# Altium PCB SD171-6.0PCB4.PcbDoc (part 3 of 11)
Units mil, origin at the board's own origin, x right, y up, seen from the top; angles counter-clockwise.
Board outline 5995 x 3921.26 mil, 6 copper layers (Top Layer, GND, Mid-Layer 1, Mid-Layer 2, VCC, Bottom Layer); 477 components, 539 nets, 2143 pads, 1050 vias.
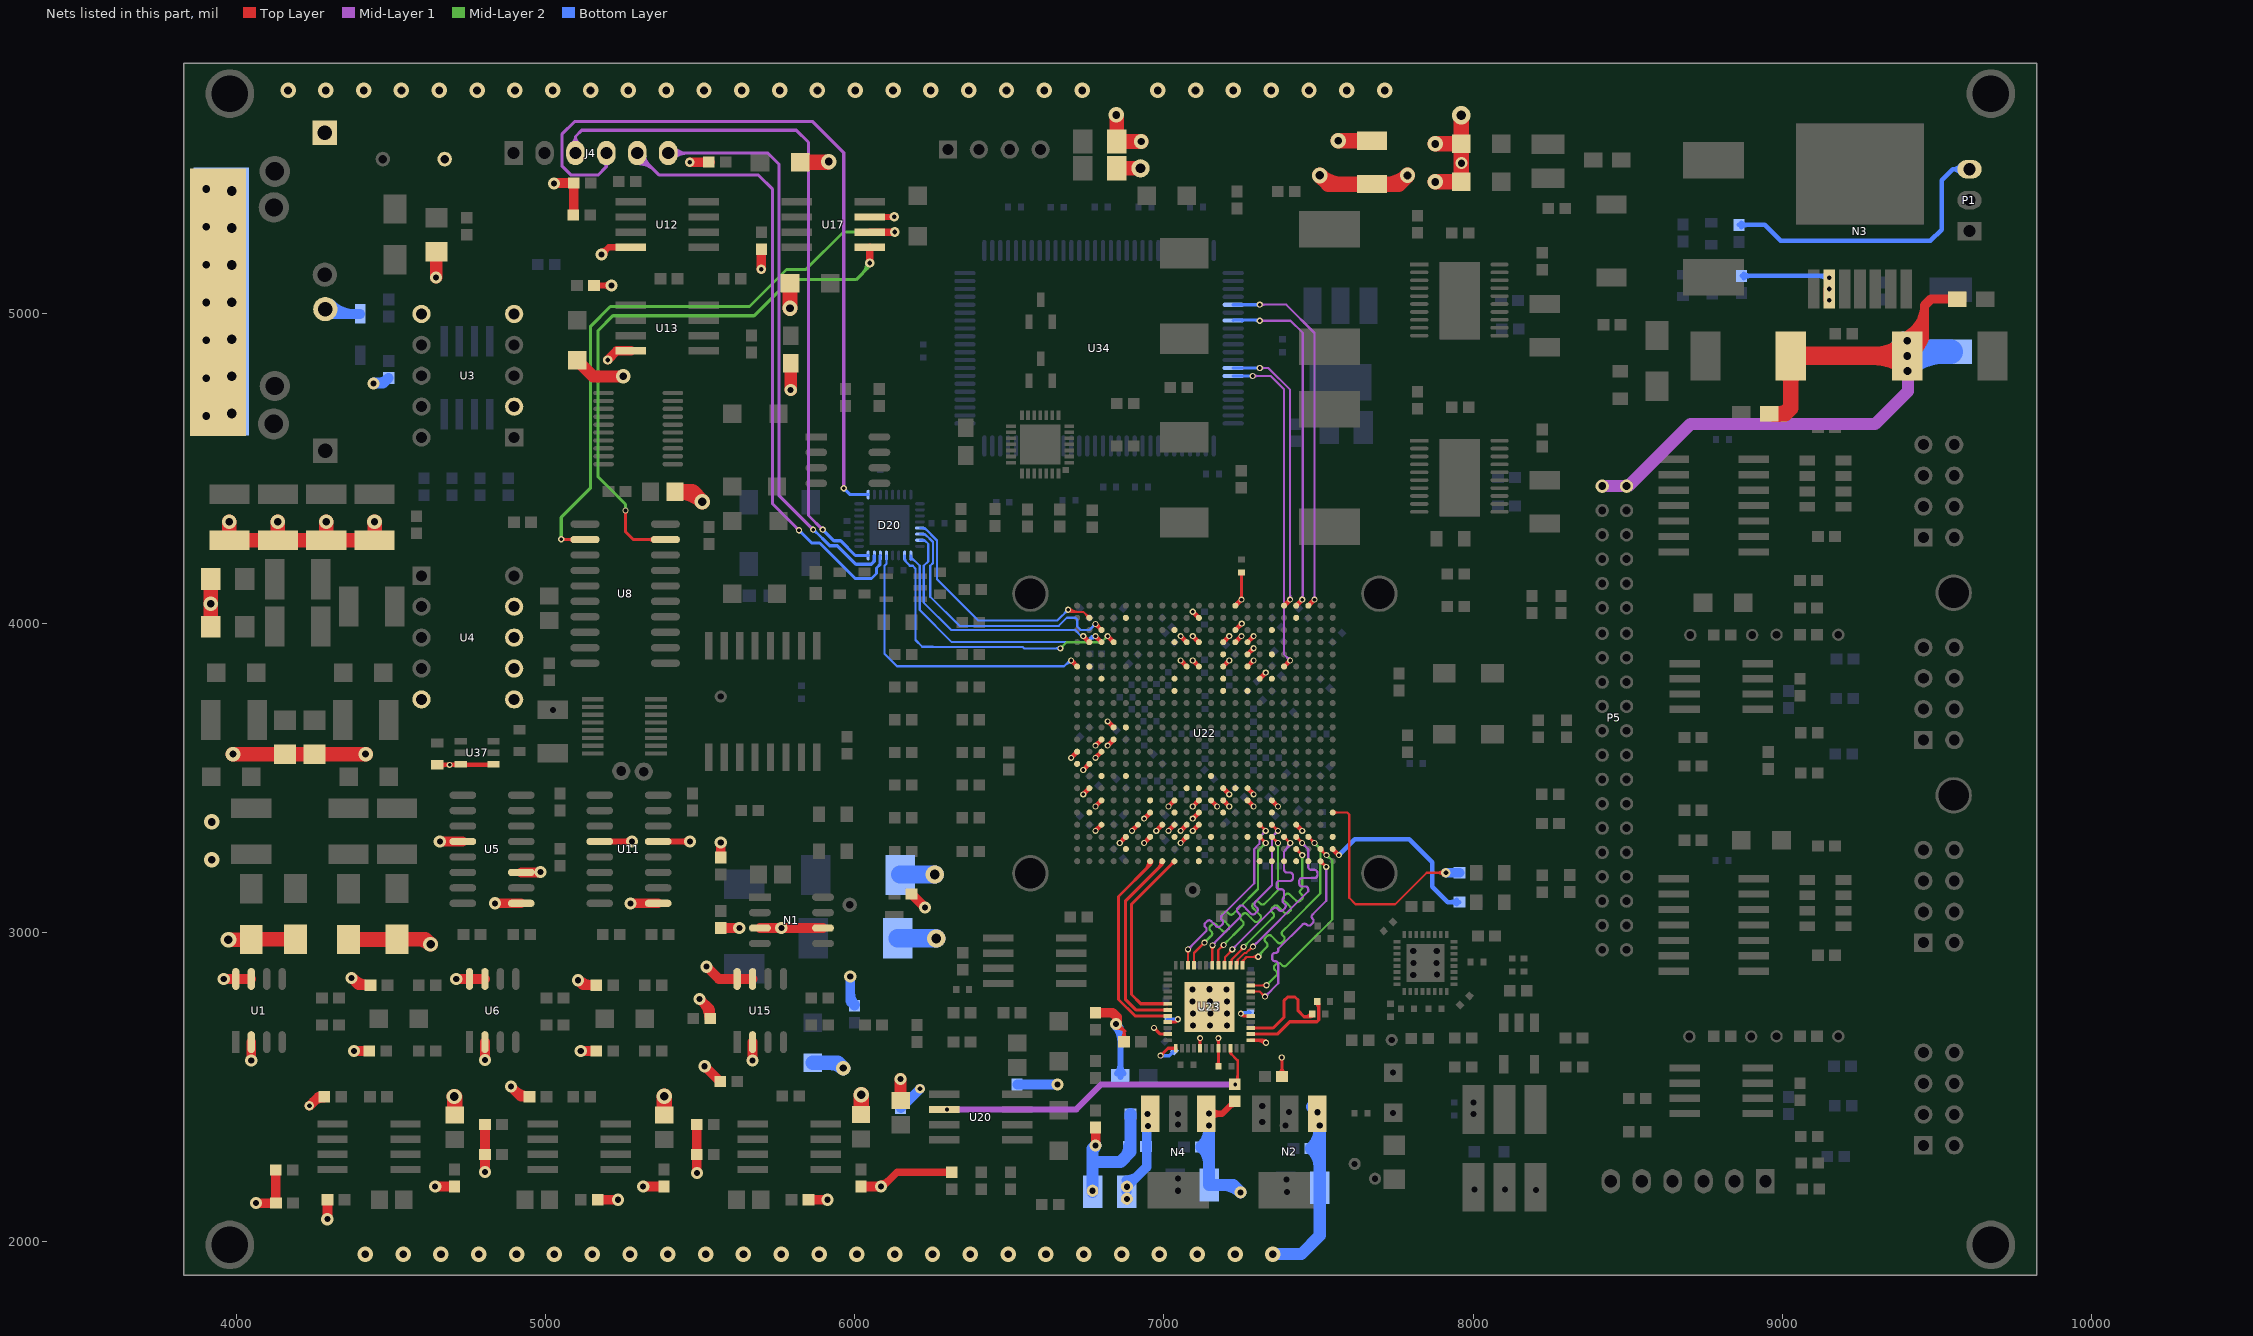
[diagram p7: the nets of this part, all layers, seen from the top]

## Via types
v1: diameter 19.68, hole 11.81, Top Layer to Bottom Layer, 521 vias
v2: diameter 50, hole 25, Top Layer to Bottom Layer, 162 vias
v3: diameter 30, hole 15, Top Layer to Bottom Layer, 100 vias
v4: diameter 39.37, hole 19.68, Top Layer to Bottom Layer, 74 vias
v5: diameter 31.5, hole 15.75, Top Layer to Bottom Layer, 44 vias
v6: diameter 40, hole 20, Top Layer to Bottom Layer, 38 vias
v7: diameter 24, hole 12, Top Layer to Bottom Layer, 33 vias
v8: diameter 47.24, hole 23.62, Top Layer to Bottom Layer, 24 vias
v9: diameter 59.06, hole 31.5, Top Layer to Bottom Layer, 10 vias
v10: diameter 60, hole 30, Top Layer to Bottom Layer, 9 vias
v11: diameter 25.98, hole 12.99, Top Layer to Bottom Layer, tented top, 9 vias
v12: diameter 23.62, hole 11.81, Top Layer to Bottom Layer, 8 vias
v13: diameter 20, hole 12, Top Layer to Bottom Layer, 6 vias
v14: diameter 50, hole 27.56, Top Layer to Bottom Layer, 4 vias
v15: diameter 51.18, hole 27.56, Top Layer to Bottom Layer, 2 vias
v16: diameter 39.37, hole 23.62, Top Layer to Bottom Layer, 2 vias
v17: diameter 80, hole 40, Top Layer to Bottom Layer, 1 vias
v18: diameter 47.24, hole 19.68, Top Layer to Bottom Layer, 1 vias
v19: diameter 47.24, hole 27.56, Top Layer to Bottom Layer, 1 vias
v20: diameter 22.05, hole 11.81, Top Layer to Bottom Layer, 1 vias

## Nets (pads, with @x,y where several pads share a name; then routed paths per layer and width w, separated by ;. In a path a pad name is that pad's centre, name@x,y a point inside that pad or via, vN(x,y) a via of type N, cw(c..) or ccw(c..) an arc to the next point about the centre after c; other vN are vias at no path point) (continued)
ADCLK_N: C62.1 U23.39 | length 360.8
  Top Layer w10: U23.39@7280.71,2689.4 7353.4,2689.4 7389,2725 7389,2779 7400,2790 7424,2790 7434,2780 7434,2746 7434,2745 7453,2726 ; C62.1@7473.56,2726 ccw(c7473.56,2738.8) C62.1@7483.63,2730.9 ; C62.1@7475.77,2737.07 cw(c7453,2754.94) 7453,2726 ; C62.1@7479.7,2734.98 7478.98,2734.98 7470,2726 7453,2726
ADCLK_P: C63.1 U23.38 | length 323.9
  Top Layer w10: U23.38@7280.71,2669.7 7366.7,2669.7 7407,2710 7495,2710 7501,2716 7500.7,2716.3 7500.7,2768.98 C63.1@7494.7,2774.98 ; C63.1@7492.16,2770.45 cw(c7471.56,2749.84) 7500.7,2749.84
ADCSB: U22.T22 U23.20 | length 733.2
  Top Layer w10: 6938.85,3200.85 ccw(c6910.48,3229.23) U22.T22@6950.61,3229.23 ; U22.T22@6952.02,3225.8 cw(c6943.76,3217.54) 6955.45,3217.54 cw(c6967.14,3217.54) U22.T22@6958.87,3225.8 ; U22.T22@6955.45,3229.23 6955.45,3217.45 6853,3115 6853,2782 6906.2,2728.8 U23.20@7012.11,2728.8 ; 6955.92,3217.92 ccw(c6944.62,3229.23) U22.T22@6960.61,3229.23
ADOUT: U8.9 U17.5 | length 1972.3
  Top Layer w10: v1@5254.58,4360.58 cw(c5246.31,4352.31) 5258,4352.31 cw(c5269.69,4352.31) v1@5261.42,4360.58 ; v1(5258,4364) 5258,4295 5283,4270 U8.9@5386.92,4270 ; U8.9@5346.67,4265.18 ccw(c5335.04,4253.56) 5335.04,4270 ccw(c5335.04,4286.44) U8.9@5346.67,4274.82
  Top Layer w23.62: v3@6047.62,5165.38 U17.5@6047.62,5215.48
  Mid-Layer 2 w10: v1@5254.58,4367.42 ccw(c5246.31,4375.69) 5258,4375.69 ccw(c5269.69,4375.69) v1@5261.42,4367.42 ; v1(5258,4364) 5258,4384 5169,4473 5169,4946 5217,4994 5674,4994 5791,5111 6004,5111 6048,5155 v3(6048,5165) cw(c6023.86,5165) 6040.93,5147.93 ; 6023.86,5130.86 ccw(c5989.72,5165) v3@6038,5165
ADSCLK: U22.R22 U23.19 | length 677.8
  Top Layer w10: 6979.9,3204.9 ccw(c6955.57,3229.23) U22.R22@6989.98,3229.23 ; U22.R22@6994.82,3229.23 6994.82,3219.82 6875,3100 6875,2782.63 6909.13,2748.5 U23.19@7012.11,2748.5 U23.19@7009.81,2750.8
ADSDIO: U22.P22 U23.18 | length 636.7
  Top Layer w10: U23.18@7012.11,2768.1 6924.9,2768.1 6895,2798 6895,3090.04 U22.P22@7034.19,3229.23 ; U22.P22@7029.35,3229.23 cw(c7017.66,3229.23) 7025.92,3220.96 cw(c7034.19,3212.69) U22.P22@7034.19,3224.39
ADV: U22.C1 U34.85 | length 1348.5
  Top Layer w15: U22.C1@7467.26,4056 v1(7486.95,4075.69)
  Mid-Layer 1 w7: v1(7310,5030) 7395.46,5030 7486.95,4938.52 v1(7486.95,4075.69) ; 7325.31,5030 cw(c7325.31,5045.31) 7314.48,5034.48 ccw(c7325.31,5045.31) 7325.31,5030 ; 7325.31,5030 ccw(c7325.31,5014.69) 7314.48,5025.52 cw(c7325.31,5014.69) 7325.31,5030 ; v1@7482.46,4080.17 ccw(c7471.63,4091) 7486.95,4091 ; v1@7482.46,4080.17 ccw(c7471.63,4091) 7486.95,4091 ; v1@7482.46,4080.17 ccw(c7471.63,4091) 7486.95,4091 ; 7486.95,4091 ccw(c7502.26,4091) v1@7491.43,4080.17 ; 7486.95,4091 ccw(c7502.26,4091) v1@7491.43,4080.17 ; 7486.95,4091 ccw(c7502.26,4091) v1@7491.43,4080.17
  Bottom Layer w10: U34.85@7224.06,5029.75 7309.75,5029.75 v1(7310,5030) ; 7297.7,5029.75 ccw(c7297.7,5042.3) 7306.58,5033.42 cw(c7297.7,5042.3) 7297.7,5029.75 ; 7298.92,5029.75 cw(c7298.92,5018.92) 7306.58,5026.58 ccw(c7298.92,5018.92) 7298.92,5029.75
AGND: C1.2 C2.2 C5.2 C6.2 C7.2 C8.2 C9.2 C10.2 C11.2 C13.1 C14.1 C15.2 C16.2 C19.1 C21.2 C25.2 C26.2 C27.2 C30.2 C31.2 C32.2 C33.2 C34.1 C36.2 C37.1 C39.2 C42.2 C44.2 C48.2 C50.2 C51.2 C53.1 C66.2 C67.2 C68.2 C76.2 C108.1 C109.2 C111.1 C112.1 C116.2 C137.1 C149.1 C150.1 C151.1 C157.1 C202.2 C203.2 C212.2 C213.2 C214.2 D1.2 D2.1 D3.2 D5.1 N1.3 N1.6 N2.1 N4.1 pad.0@3939,5038 pad.0@3950,5040 pad.0@6769,2163 pad.0@6924,5471 pad.0@7092,2814 pad.0@7093,2776 pad.0@7094,2698 pad.0@7094,2737 pad.0@7146.12,2374 pad.0@7146.12,2412.88 pad.0@7148,2815 pad.0@7149,2698 pad.0@7149,2776 pad.0@7150,2737 pad.0@7203,2814 pad.0@7204,2698 pad.0@7204,2737 pad.0@7204,2775 pad.0@7248,2158 pad.0@7497,2417 pad.0@7504.12,2374 pad.1@3984,4678 pad.1@3984,4798 pad.1@3984,4918 pad.1@3984,5038 pad.1@3984,5158 pad.1@3984,5278 pad.1@3984,5398 Q1.1 Q2.2 R3.1 R5.2 R7.1 R13.1 R16.1 R27.1 R31.1 R39.1 R40.1 R42.2 R64.2 R77.1 R78.2 R81.1 R116.2 U1.2 U1.7 U1.8 U3.2 U3.5 U3.6 U4.5 U4.6 U4.7 U4.8 U4.9 U5.1 U5.3 U5.12 U6.2 U6.7 U6.8 U11.1 U11.5 U11.12 U12.4 U13.4 U15.2 U15.7 U15.8 U17.7 U23.21 U23.23 U23.25 U23.29 U23.32 U23.37 U23.41 U23.49 Z1.1 | length 12063.4
  Top Layer w10: v4@6846.52,2688.39 cw(c6849.9,2655.9) 6873,2679 ; v4@6848,2704 6871,2681 C48.2@6871,2645 ; v4@6859.68,2703 ccw(c6885.48,2703) 6867.24,2684.76 ; C48.2@6861.81,2654.19 ccw(c6839.62,2676.38) 6871,2676.38 ccw(c6902.38,2676.38) C48.2@6880.19,2654.19 ; v1@6968,2685.16 cw(c6968,2673.47) 6976.27,2681.73 cw(c6984.53,2690) v1@6972.84,2690 ; v1(6968,2690) 6988.3,2669.7 U23.23@7012.11,2669.7 ; v1(6989,2600) 7013,2624 U23.25@7038.11,2624 ; v1@6989,2604.84 ccw(c6989,2616.53) 6997.27,2608.27 ccw(c7005.53,2600) v1@6993.84,2600 ; U23.21@7012.11,2709.1 7039.1,2709.1 7048,2718 v1(7045,2718) ; v1@7113.58,2653.58 cw(c7105.53,2645.53) 7116.91,2645.53 ; U23.29@7116.91,2624 7116.91,2656.91 v1(7117,2657) ; 7116.91,2645.09 cw(c7128.91,2645.09) v1@7120.42,2653.58 ; v1@7172.58,2653.58 cw(c7164.53,2645.53) 7175.91,2645.53 ; C149.1@7172.77,2570.52 ccw(c7165.18,2578.11) 7175.91,2578.11 ; 7175.91,2580 ccw(c7189.32,2580) C149.1@7179.84,2570.52 ; 7175.91,2645.09 cw(c7187.91,2645.09) v1@7179.42,2653.58 ; v1(7176,2657) 7175.91,2656.91 U23.32@7175.91,2624 7175.91,2573.37 C149.1@7177.3,2571.98 ; v1(7249,2736) 7256.2,2728.8 U23.41@7280.71,2728.8 ; U23.37@7280.71,2650 7319,2650 7329,2640 7329,2641 v1(7330,2642) ; 7298.99,2650 cw(c7298.99,2610.99) v1@7326.58,2638.58 ; 7323.13,2650 cw(c7323.13,2635.13) v1@7333.65,2645.65 ; R81.1@7372.91,2541.45 ccw(c7350.72,2563.64) 7382.1,2563.64 ccw(c7413.49,2563.64) R81.1@7391.29,2541.45 ; v1@7377.58,2590.58 cw(c7366.65,2579.65) 7382.1,2579.65 ; v1(7381,2594) 7382.1,2592.9 R81.1@7382.1,2532.26
  Top Layer w20: C19.1@5156,5092 v4(5213,5092) ; U11.12@5174.51,3293 v4(5279,3293) ; v4(5180,5192) 5203.48,5215.48 U12.4@5275.4,5215.48 ; v4@5180,5201.69 ccw(c5180,5225.07) 5196.53,5208.53 ccw(c5213.07,5192) v4@5189.69,5192 ; U11.5@5363.49,3293 v4(5466,3293) ; U17.7@6047.62,5313.91 6127.09,5313.91 v3(6127,5314) ; N4.1@7136.55,2412.29 7188.29,2412.29 C137.1@7229,2453 ; N4.1@7150.36,2398.48 cw(c7183.69,2365.15) 7183.69,2412.29 cw(c7183.69,2459.43) N4.1@7150.36,2426.1 ; N4.1@7152.97,2406.03 cw(c7168.07,2390.93) 7168.07,2412.29 ; N4.1@7152.97,2419.73 ccw(c7170.93,2437.69) 7170.93,2412.29 ; C137.1@7213.64,2437.64 cw(c7229,2422.27) C137.1@7229,2444 ; 5176.31,5092 ccw(c5176.31,5072.69) 5162.66,5086.34 cw(c5176.31,5072.69) 5176.31,5092 ; 5176.31,5092 cw(c5176.31,5111.31) 5162.66,5097.66 ccw(c5176.31,5111.31) 5176.31,5092 ; 5189.62,5092 cw(c5189.62,5068.62) 5206.15,5085.15 ccw(c5189.62,5068.62) 5189.62,5092 ; 5189.62,5092 ccw(c5189.62,5115.38) 5206.15,5098.85 cw(c5189.62,5115.38) 5189.62,5092 ; 5255.62,3293 cw(c5255.62,3269.62) 5272.15,3286.15 ccw(c5255.62,3269.62) 5255.62,3293 ; 5255.62,3293 ccw(c5255.62,3316.38) 5272.15,3299.85 cw(c5255.62,3316.38) 5255.62,3293 ; 5442.62,3293 cw(c5442.62,3269.62) 5459.15,3286.15 ccw(c5442.62,3269.62) 5442.62,3293 ; 5442.62,3293 ccw(c5442.62,3316.38) 5459.15,3299.85 cw(c5442.62,3316.38) 5442.62,3293
  Top Layer w23.62: v4(6084,2177) 6090,2177 6136,2223 R64.2@6313.33,2223 ; v4@6084,2184.87 ccw(c6084,2218.37) 6107.68,2194.68
  Top Layer w30: v3(5200,4851) 5229.48,4880.48 U13.4@5275.4,4880.48 ; v3(5466,5491) C34.1@5532,5491 ; v3(5697,5145) 5697.31,5145.31 C36.2@5697.31,5209.69
  Top Layer w31.5: v4(3958,2848) 3996.75,2848 U1.8@3997,2848.25 U1.7@4047,2848.25 ; v4(4047,2584) U1.2@4047,2644 ; v4(4062,2123) C5.2@4127,2123 4126,2124 R5.2@4126,2230 ; v5(4235,2438) 4264,2467 C8.2@4283,2467 ; v4(4293,2071) 4294,2072 C9.2@4294,2134 ; v4(4371,2851) 4394,2828 C10.2@4433,2828 ; v4(4379,2615) C11.2@4429,2615 ; v4(4642,2177) C15.2@4705,2177 ; v4(4657,3293) U5.12@4731.51,3293 ; v4(4710.25,2848.25) U6.8@4753,2848.25 U6.7@4803,2848.25 ; v4(4803,2224) C16.2@4803,2280 R27.1@4803,2377 ; v4(4803,2586) U6.2@4803,2644 ; v4(4836,3093) U5.1@4920.49,3093 ; v4(4887,2500) 4920,2467 C21.2@4947,2467 ; v4@4897.77,2489.23 ccw(c4946,2537.46) C21.2@4946,2469.25 ; v4@4900,2487 ccw(c4943.02,2530.01) C21.2@4945.89,2469.25 ; U5.3@4920.49,3193 4982,3193 v4(4983,3194) ; v4(5027,5422) 5029,5424 C212.2@5090,5424 5090,5321 R31.1@5089,5320 ; v4(5104,2844) 5120,2828 C26.2@5163,2828 ; v4(5113,2615) C27.2@5163,2615 ; C25.2@5168,2134 v4(5234,2134) ; v4(5274,3092) 5275,3093 U11.1@5363.49,3093 ; v4(5315,2177) C31.2@5382,2177 ; R40.1@5488.37,2377 5488.37,2220.63 v4(5489,2220) ; v4(5497,2784) 5532,2749 R39.1@5532,2720 R39.1@5533,2719 ; v4(5514,2566) C30.2@5564,2516 ; v4(5520,2888) 5559.75,2848.25 U15.8@5619,2848.25 U15.7@5669,2848.25 ; R42.2@5566,3013 v4(5626,3013) ; C32.2@5566,3241 v4(5566,3290) ; v4(5669,2584) U15.2@5669,2644 ; N1.3@5692.75,3013 v4(5762,3013) N1.6@5897,3013 ; C39.2@5850,2134 v4(5911,2134) ; v4@5985,2855 v4(5985,2856) ; C42.2@6020,2177 v4(6084,2177) ; C44.2@6183,3123 v4(6227,3079) ; v4(6779,2309) C53.1@6779,2368 ; C51.2@6779,2739 6834,2739 6848,2725 v4@6848,2704 ; C10.2@4433,2828 cw(c4433,2908.88) 4373.88,2853.69 ccw(c4433,2908.88) C10.2@4433,2828 ; 4247.43,2450.43 cw(c4282,2415.86) 4282,2464.75 ccw(c4282,2415.86) 4247.43,2450.43 ; v4@5106.78,2846.78 ccw(c5152.13,2892.13) 5152.13,2828 cw(c5152.13,2892.13) v4@5106.78,2846.78 ; v4@5505.94,2775.06 cw(c5450.88,2720) 5528.75,2720 ccw(c5450.88,2720) v4@5505.94,2775.06
  Top Layer w39.37: v4(4645,5118) 4645.67,5118.67 C14.1@4645.67,5200.79
  Top Layer w40: v6(5792,4754) C37.1@5792,4840
  Top Layer w47.24: C1.2@3915.76,4142 3915.76,4062.24 v8@3915.88,4062.12 ; C2.2@3915.88,3988 v8@3915.88,4062.12 ; v8(3916,4062) v8@3915.88,4062.12 ; v15(3973,2975) 4046,2975 D1.2@4047,2976 4047.98,2976.98 D2.1@4190,2976.98 ; v8(3976,4328) 3976.38,4327.62 R3.1@3976.38,4267.72 R7.1@4132.98,4267.72 ; v8(3988,3576) 3988.12,3575.88 C6.2@4156,3575.88 C7.2@4252,3575.88 v8(4416.88,3575.88) ; v8(4132.61,4328) 4132.98,4327.62 R7.1@4132.98,4267.72 ; v8(4289.21,4328) 4289.59,4327.62 R13.1@4289.59,4267.72 ; D3.2@4362,2976 4518.02,2976 D5.1@4519,2976.98 4610.02,2976.98 v19(4627,2960) ccw(c4586,2919) 4586,2976.98 ; v8(4445.82,4328) 4446.19,4327.62 R16.1@4446.19,4267.72 R13.1@4289.59,4267.72 ; v2(6846,5644) 6847.12,5642.88 R77.1@6847.12,5558 v8(6927,5558) ; R78.2@6847.12,5471 pad.0@6924,5471 ; R7.1@4132.98,4267.72 R13.1@4289.59,4267.72
  Top Layer w50: v15(7504,5448) 7532,5420 C68.2@7673,5420 7760,5420 v2(7788,5448) ; v2(7788,5448) cw(c7720.4,5515.6) 7720.4,5420 ccw(c7720.4,5515.6) v2(7788,5448) ; v15@7504.42,5448.42 ccw(c7573.02,5517.02) 7573.02,5420 cw(c7573.02,5517.02) v15@7504.42,5448.42
  Bottom Layer w10: v1(6989,2600) 7017.57,2600 C157.1@7033.39,2615.83 ; v1@6992.42,2596.58 cw(c7000.69,2588.31) 7000.69,2600 cw(c7000.69,2611.69) v1@6992.42,2603.42 ; C151.1@7012,2718 v1(7045,2718) ; C151.1@7016.54,2714.46 cw(c7025.07,2705.93) 7025.07,2718 cw(c7025.07,2730.07) C151.1@7016.54,2721.54 ; v1@7041.58,2714.58 ccw(c7033.31,2706.31) 7033.31,2718 ccw(c7033.31,2729.69) v1@7041.58,2721.42 ; v1(7249,2736) 7252.3,2739.3 C150.1@7280.02,2739.3 ; v1@7252.42,2732.58 cw(c7268.66,2716.34) 7268.66,2739.3 ; C150.1@7275.48,2735.77 ccw(c7266.95,2727.23) 7266.95,2739.3 ccw(c7266.95,2751.37) C150.1@7275.48,2742.84
  Bottom Layer w20: v4@6838.15,2696.15 cw(c6787.82,2645.82) 6859,2645.82 ; v4@6848,2704 6859,2693 C50.2@6859,2532 ; C50.2@6848.39,2542.61 ccw(c6822.79,2568.21) 6859,2568.21 ccw(c6895.21,2568.21) C50.2@6869.61,2542.61
  Bottom Layer w31.5: Q2.2@4286.66,5015.74 4302.47,4999.93 Z1.1@4400,4999.93 ; Q2.2@4303.36,5032.44 ccw(c4381.86,5110.94) 4381.86,4999.93 ; v4(4443,4775) 4474,4775 R116.2@4492,4793 ; v4(5985,2856) 5985,2776 C111.1@5999,2762 ; C112.1@6148,2430 v5(6211,2493) ; C116.2@6525,2507 v4(6656,2507) ; v4@4443.84,4778.85 ccw(c4454.95,4830.04) R116.2@4492,4793 ; v4@4443.84,4778.85 ccw(c4454.95,4830.04) R116.2@4492,4793 ; v4@4443.84,4778.85 ccw(c4454.95,4830.04) R116.2@4492,4793 ; v4@4445.52,4775 ccw(c4445.52,4838.48) 4490.41,4793.59 cw(c4445.52,4838.48) v4@4445.52,4775 ; 5985,2802.24 ccw(c6038.24,2802.24) 6000.59,2764.59 cw(c6038.24,2802.24) 5985,2802.24
  Bottom Layer w39.37: C67.2@6768.88,2160 6768.88,2298.88 v4(6779,2309) ccw(c6803.43,2284.57) 6768.88,2284.57 ; 6776,2256 6859,2256 6892,2289 C202.2@6892,2411 ; 6872.61,2269.61 ccw(c6836.23,2306) C203.2@6887.68,2306 ; C214.2@7122.19,2303.81 ccw(c7064.43,2361.57) pad.0@7146.12,2361.57 ; C214.2@7122.19,2306.19 cw(c7064.43,2248.43) 7146.12,2248.43 ; pad.0@7145,2414 pad.0@7146.12,2412.88 C213.2@7146.12,2182 7224,2182 pad.0@7248,2158 ccw(c7190.06,2100.06) 7190.06,2182 ; v2(7352.31,1958) 7444,1958 7504.12,2018.12 C66.2@7504.12,2173 7504.12,2409.88 pad.0@7497,2417 ; C76.2@7476.19,2298.81 ccw(c7408.77,2366.23) pad.0@7504.12,2366.23 ; C76.2@7476.19,2301.19 cw(c7408.77,2233.77) 7504.12,2233.77 ; 7479.06,2434.94 cw(c7418.57,2374.44) pad.0@7504.12,2374
  Bottom Layer w59.06: C109.2@6138,2980 6262,2980 v9(6263,2979) ; C108.1@6146.62,3186 v9(6258,3186)
  other v2: 4415.99,1958 4538.34,1958 4660.69,1958 4783.03,1958 4905.38,1958 5027.73,1958 5150.07,1958 5272.42,1958 5394.76,1958 5517.11,1958 5639.46,1958 5761.8,1958 5884.15,1958 6006.5,1958 6128.84,1958 6251.19,1958 6373.54,1958 6495.88,1958 6618.23,1958 6740.58,1958 6862.92,1958 6985.27,1958 7107.61,1958 7229.96,1958 3919,3234 3919,3356.35 3901,4669.92 3901,4792.27 3901,4914.61 3901,5036.96 3901,5159.31 3901,5281.65 3901,5404 4165.95,5723 4288.3,5723 4410.65,5723 4532.99,5723 4655.34,5723 4777.69,5723 4900.03,5723 5022.38,5723 5144.73,5723 5267.07,5723 5389.42,5723 5511.76,5723 5634.11,5723 5756.46,5723 5878.8,5723 6001.15,5723 6123.5,5723 6245.84,5723 6368.19,5723 6490.54,5723 6612.88,5723 6735.23,5723 6979.92,5723 7102.27,5723 7224.61,5723 7346.96,5723 7469.31,5723 7591.65,5723 7714,5723
  other v4: 6845,2703
ASCLK: U8.12 U17.6 | length 2094.1
  Top Layer w10: v1(5050,4271) 5051,4270 U8.12@5127.08,4270 ; v1@5053.42,4274.42 ccw(c5064.1,4285.1) 5064.1,4270 ; U8.12@5086.83,4265.18 ccw(c5075.2,4253.56) 5075.2,4270 ccw(c5075.2,4286.44) U8.12@5086.83,4274.82
  Top Layer w23.62: U17.6@6047.62,5264.69 v5@6128.69,5264.69
  Mid-Layer 2 w10: v1@5046.58,4274.42 ccw(c5038.31,4282.69) 5050,4282.69 ccw(c5061.69,4282.69) v1@5053.42,4274.42 ; v1(5050,4271) 5050,4342 5144,4436 5144,4959 5209,5024 5659,5024 5778.5,5143.5 5841.5,5143.5 5963,5265 v5(6129,5265) ; v5@6121.4,5257.4 ccw(c6103.05,5239.05) 6103.05,5265 ccw(c6103.05,5290.95) v5@6121.4,5272.6
AVCC5V: C67.1 C68.1 C202.1 C203.1 C221.1 L7.1 L11.1 L13.2 L14.1 L17.1 L18.2 L19.1 L21.1 L30.1 L31.1 L35.1 N4.3 pad.0@6880,2137 pad.0@6880,2176.12 pad.0@6947,2411 pad.0@6948.82,2372 U37.3 U37.4 | length 2251.4
  Top Layer w15: C221.1@4649,3541 v1(4689,3541) 4829.55,3541 U37.4@4831.15,3542.6 ; C221.1@4658.99,3535.7 cw(c4671.79,3522.89) 4671.79,3541 cw(c4671.79,3559.11) C221.1@4658.99,3546.3 ; 4704.1,3541 ccw(c4704.1,3554.49) U37.3@4713.64,3544.95 ; U37.3@4736.06,3544.95 ccw(c4745.6,3554.49) 4745.6,3541 ; 4810.4,3541 ccw(c4810.4,3554.49) U37.4@4819.94,3544.95
  Top Layer w39.37: L11.1@5101,4850 5153,4798 v8(5251,4798) ; L21.1@6148,2455.37 v4(6148,2525)
  Top Layer w50: v14(4704,2468) 4705,2467 L7.1@4705,2408.37 ; L14.1@5383,2408.37 v14(5383,2469) ; L13.2@5417.37,4425 5474,4425 v14(5506,4393) ; v2(5790,5018) L18.2@5790,5100 ; L17.1@5824,5491 v2@5912,5491 ; L19.1@6020,2409.37 v14(6020,2474) ; v2(7564,5560) C68.1@7673,5560 ; v2(7878,5427) L31.1@7962,5427 L30.1@7962,5550 ; v2(7878,5550) L30.1@7962,5550 ; v9(7962,5643) L30.1@7962,5550 ; L30.1@7962.88,5549.12 L30.1@7962,5550 ; L13.2@5428.75,4425 cw(c5428.75,4315.75) v14(5506,4393) ; L13.2@5428.75,4425 cw(c5428.75,4315.75) v14(5506,4393) ; L13.2@5428.75,4425 cw(c5428.75,4315.75) v14(5506,4393)
  Bottom Layer w31.5: C67.1@6879.12,2160 6879.12,2175.12 6944,2240 6944,2408 pad.0@6947,2411 ; C67.1@6879.12,2197.4 ccw(c6879.12,2251.2) 6917.16,2213.16 ; 6944,2350.86 cw(c6969.96,2350.86) pad.0@6951.6,2369.22 ; pad.0@6944,2393.14 ccw(c6969.96,2393.14) pad.0@6951.6,2374.78
  Bottom Layer w47.24: L35.1@5864,2577 5945,2577 v8(5962,2560) ; v8(5962,2560) ccw(c5920.96,2518.96) 5920.96,2577 cw(c5920.96,2518.96) v8(5962,2560)
  other v2: 5915,5493
  other v16: 7963,5488
B1_LED: R123.1 U22.A21 | length 649.3
  Top Layer w15: U22.A21@7546,3268.6 v1(7565.69,3248.91)
  Bottom Layer w15: v1(7565.69,3248.91) 7616.77,3300 7794,3300 7868,3226 7868,3147 7918,3097 R123.1@7956,3097 ; 7929.65,3097 ccw(c7929.65,3122.35) 7947.58,3104.42 cw(c7929.65,3122.35) 7929.65,3097 ; 7929.65,3097 cw(c7929.65,3071.65) 7947.58,3089.58 ccw(c7929.65,3071.65) 7929.65,3097
B1_NC1: U22.A20
B1_NC4: U22.E22
B1_NC13: U22.F22
B1_NC14: U22.C22 | length 1.5
  Top Layer w15: U22.C22@7467.26,3229.23 U22.C22@7467.26,3230.74
B1_NC16: U22.D19 | length 28.5
  Top Layer w15: U22.D19@7427.89,3347.34 v1(7447.58,3327.65)
  Mid-Layer 1 w7: v1@7447.58,3326.97 v1(7447.58,3327.65)
B1_NC17: U22.F21
B1_NC19: U22.J16
B1_NC21: U22.N20 | length 27.8
  Top Layer w15: v1(7053.87,3288.28) U22.N20@7073.56,3307.97
B1_NC24: U22.H17 | length 28.5
  Top Layer w15: U22.H17@7270.41,3426.08 v1(7290.1,3406.39)
  Mid-Layer 1 w7: v1@7290.1,3405.71 v1(7290.1,3406.39)
B1_NC25: U22.F18
B1_NC26: U22.H16 | length 27.8
  Top Layer w15: U22.H16@7270.41,3465.45 v1(7290.1,3445.76)
B1_NC27: U22.K16 | length 27.8
  Top Layer w15: U22.K16@7191.67,3465.45 v1(7211.36,3445.76)
B1_NC28: U22.G22
B1_NC29: U22.K17 | length 27.8
  Top Layer w15: U22.K17@7191.67,3426.08 v1(7211.36,3406.39)
B1_NC30: U22.L20 | length 0.3
  Top Layer w15: U22.L20@7152.3,3307.7 U22.L20@7152.3,3307.97
B1_NC31: U22.M22
B1_NC32: U22.H20
B1_NC33: U22.F17 | length 27.8
  Top Layer w15: U22.F17@7349.15,3426.08 v1(7368.84,3406.39)
B1_NC34: U22.M21
B1_NC38: U22.D22
B1_NC39: U22.V21
B1_NC41: U22.M19 | length 27.8
  Top Layer w15: v1(7093.24,3327.65) U22.M19@7112.93,3347.34
B1_NC42: U22.N19 | length 27.8
  Top Layer w15: v1(7053.87,3327.65) U22.N19@7073.56,3347.34
B1_NC43: U22.M16
B1_NC44: U22.L15
B1_NC45: U22.P19 | length 27.8
  Top Layer w15: v1(7014.5,3327.65) U22.P19@7034.19,3347.34
B1_NC46: U22.P20
B1_NC49: U22.L17 | length 27.8
  Top Layer w15: U22.L17@7152.3,3426.08 v1(7171.99,3406.39)
B1_NC50: U22.K18
B1_NC51: U22.U19 | length 27.8
  Top Layer w15: v1(6896.39,3327.65) U22.U19@6916.08,3347.34
B1_NC52: U22.V20 | length 27.8
  Top Layer w15: v1(6857.02,3288.28) U22.V20@6876.71,3307.97
B1_NC53: U22.M17 | length 27.8
  Top Layer w15: v1(7093.24,3406.39) U22.M17@7112.93,3426.08
B1_NC54: U22.M18 | length 27.8
  Top Layer w15: v1(7093.24,3367.02) U22.M18@7112.93,3386.71
B1_NC55: U22.P17 | length 27.8
  Top Layer w15: v1(7014.5,3406.39) U22.P17@7034.19,3426.08
B1_NC56: U22.N16
B1_NC57: U22.P18
B1_NC58: U22.R19 | length 27.8
  Top Layer w15: v1(6975.13,3327.65) U22.R19@6994.82,3347.34
B1_NC59: U22.T20 | length 27.8
  Top Layer w15: v1(6935.76,3288.28) U22.T20@6955.45,3307.97
B4NC1: U22.J3 | length 29.6
  Top Layer w15: U22.J3@7231.04,3977.26 v1(7251.78,3998) v1@7252,3998
B4NC2: U22.M2 | length 27.8
  Top Layer w15: v1(7093.24,4036.32) U22.M2@7112.93,4016.63
B4NC3: U22.K5
B4NC4: U22.H6 | length 27.8
  Top Layer w15: U22.H6@7270.41,3859.15 v1(7290.1,3878.84)
B4NC5: U22.F3
B4NC7: U22.M4 | length 27.8
  Top Layer w15: v1(7093.24,3957.58) U22.M4@7112.93,3937.89
B4NC8: U22.J4 | length 27.8
  Top Layer w15: U22.J4@7231.04,3937.89 v1(7250.73,3957.58)
B4NC9: U22.K4 | length 27.8
  Top Layer w15: U22.K4@7191.67,3937.89 v1(7211.36,3957.58)
B4NC10: U22.N4 | length 27.8
  Top Layer w15: v1(7053.87,3957.58) U22.N4@7073.56,3937.89
B4NC11: U22.N6 | length 27.8
  Top Layer w15: v1(7053.87,3878.84) U22.N6@7073.56,3859.15
B4NC12: U22.P3
B4NC13: U22.F5
B4NC14: U22.K7
B4NC15: U22.K8
B4NC16: U22.V2
B4NC18: U22.P8
B4NC19: U22.H8
B4NC20: U22.K6 | length 27.8
  Top Layer w15: U22.K6@7191.67,3859.15 v1(7211.36,3878.84)
B4NC21: U22.P4
B4NC22: U22.G7 | length 27.8
  Top Layer w15: U22.G7@7309.78,3819.78 v1(7329.47,3839.47)
B4NC23: U22.F7
B4NC24: U22.H5 | length 27.8
  Top Layer w15: U22.H5@7270.41,3898.52 v1(7290.1,3918.21)
B4NC25: U22.P7
B4NC26: U22.H4 | length 27.8
  Top Layer w15: U22.H4@7270.41,3937.89 v1(7290.1,3957.58)
B4NC27: U22.M6 | length 27.8
  Top Layer w15: v1(7093.24,3878.84) U22.M6@7112.93,3859.15
B4NC29: U22.D2
BA#: U22.E1 U34.93 | length 1119.4
  Top Layer w15: U22.E1@7388.52,4056 v1(7408.21,4075.69)
  Mid-Layer 1 w7: v1(7310,4825) 7337.62,4825 7408.21,4754.41 v1(7408.21,4075.69) ; v1@7314.48,4820.52 cw(c7325.31,4809.69) 7325.31,4825 ; v1@7314.48,4820.52 cw(c7325.31,4809.69) 7325.31,4825 ; v1@7314.48,4820.52 cw(c7325.31,4809.69) 7325.31,4825 ; v1@7314.48,4829.48 ccw(c7325.31,4840.31) 7325.31,4825 ; v1@7314.48,4829.48 ccw(c7325.31,4840.31) 7325.31,4825 ; v1@7314.48,4829.48 ccw(c7325.31,4840.31) 7325.31,4825 ; v1@7403.72,4080.17 ccw(c7392.89,4091) 7408.21,4091 ; v1@7403.72,4080.17 ccw(c7392.89,4091) 7408.21,4091 ; v1@7403.72,4080.17 ccw(c7392.89,4091) 7408.21,4091 ; 7408.21,4091 ccw(c7423.52,4091) v1@7412.69,4080.17 ; 7408.21,4091 ccw(c7423.52,4091) v1@7412.69,4080.17 ; 7408.21,4091 ccw(c7423.52,4091) v1@7412.69,4080.17
  Bottom Layer w10: U34.93@7224.06,4825.02 v1(7310,4825) ; 7298.25,4825.02 cw(c7298.25,4813.25) v1@7306.58,4821.58 ; 7298.25,4825.02 cw(c7298.25,4813.25) v1@7306.58,4821.58 ; 7298.25,4825.02 cw(c7298.25,4813.25) v1@7306.58,4821.58 ; 7298.37,4825.02 ccw(c7298.37,4836.63) v1@7306.58,4828.42 ; 7298.37,4825.02 ccw(c7298.37,4836.63) v1@7306.58,4828.42 ; 7298.37,4825.02 ccw(c7298.37,4836.63) v1@7306.58,4828.42
BANK0_LED: R122.1 U22.A18 | length 829.5
  Top Layer w7: U22.A18@7546,3386.71 7593.29,3386.71 7599.39,3380.61 7599.39,3110.61 7620,3090 7748,3090 7850,3192 v5(7912,3192) ; v5@7903.34,3183.34 ccw(c7882.43,3162.43) 7882.43,3192 ccw(c7882.43,3221.57) v5@7903.34,3200.66 ; 7561.31,3386.71 ccw(c7561.31,3371.4) 7550.48,3382.22 cw(c7561.31,3371.4) 7561.31,3386.71 ; 7561.31,3386.71 cw(c7561.31,3402.02) 7550.48,3391.19 ccw(c7561.31,3402.02) 7561.31,3386.71
  Top Layer w10: U22.A18@7546,3386.71 U22.A18@7547.16,3385.55
  Bottom Layer w31.5: v5(7912,3192) R122.1@7956,3192
BANK2_NC3: U22.T18 | length 27.8
  Top Layer w15: v1(6935.76,3367.02) U22.T18@6955.45,3386.71
BANK2_NC4: U22.Y19 | length 27.8
  Top Layer w15: v1(6778.28,3327.65) U22.Y19@6797.97,3347.34
BANK2_NC6: U22.V15
BANK2_NC7: U22.AA18
BANK2_NC10: U22.AA14 | length 27.8
  Top Layer w15: v1(6738.91,3524.5) U22.AA14@6758.6,3544.19
BANK2_NC13: U22.W12 | length 27.8
  Top Layer w15: v1(6817.65,3603.24) U22.W12@6837.34,3622.93
BANK2_NC16: U22.V11
BANK2_NC20: U22.W11 | length 27.8
  Top Layer w15: v1(6817.65,3681.99) U22.W11@6837.34,3662.3
BANK2_NC25: U22.Y7
BANK2_NC27: U22.AA6
BANK2_NC28: D20.13 U22.AB6 | length 995.8
  Top Layer w15: v1(6699.54,3878.84) U22.AB6@6719.23,3859.15
  Bottom Layer w7: D20.13@6102.16,4218.57 6102.16,4191.88 6096.2,4185.92 6096.2,3899.8 6136,3860 6677,3860 6695.84,3878.84 v1(6699.54,3878.84) ; 6682.39,3865.39 cw(c6699.54,3848.23) v1@6699.54,3872.49
BANK2_NC29: D20.7 U22.AA4 | length 826.9
  Top Layer w15: v1(6738.91,3957.58) U22.AA4@6758.6,3937.89
  Bottom Layer w7: D20.7@6210.43,4267.79 6225.49,4267.79 6237.14,4256.14 6237.14,4199.14 6223,4185 6223,4066 6311.4,3977.6 6533,3977.6 6712.52,3977.6 6732.54,3957.58 v1(6738.91,3957.58) ; D20.7@6221.25,4266.37 cw(c6221.25,4252.71) 6230.91,4262.37
BANK2_NC30: U22.Y13 | length 27.8
  Top Layer w15: v1(6778.28,3563.87) U22.Y13@6797.97,3583.56
BANK2_NC31: D20.6 U22.Y3 | length 921.1
  Top Layer w15: v1(6778.28,3996.95) U22.Y3@6797.97,3977.26
  Bottom Layer w7: D20.6@6210.43,4287.47 6227.14,4287.47 6252.81,4261.81 6252.81,4194.06 6244,4185.25 6244,4085 6338.4,3990.6 6659.6,3990.6 6686,4017 6714,4017 6719.57,4011.43 6719.57,3988.93 6730.9,3977.6 6758.94,3977.6 v1(6778.28,3996.95) ; D20.6@6221.25,4286.05 cw(c6221.25,4268.4) 6233.73,4280.88 ; v1@6771.94,3996.95 cw(c6756.63,3996.95) 6767.45,3986.12 cw(c6778.28,3975.29) v1@6778.28,3990.6
BANK2_NC32: U22.Y12 | length 27.8
  Top Layer w15: v1(6778.28,3603.24) U22.Y12@6797.97,3622.93
BANK2_NC33: D20.10 U22.W4 | length 1056.9
  Top Layer w15: v1(6817.65,3957.58) U22.W4@6837.34,3937.89
  Mid-Layer 2 w7: v1(6665,3918) 6684.55,3937.55 6797.62,3937.55 v1(6817.65,3957.58) ; v1@6665,3924.34 ccw(c6665,3939.65) 6675.83,3928.83 ccw(c6686.65,3918) v1@6671.34,3918 ; v1@6811.31,3957.58 cw(c6796,3957.58) 6806.82,3946.75 cw(c6817.65,3935.92) v1@6817.65,3951.23
  Bottom Layer w7: D20.10@6161.21,4218.57 6161.21,4201.9 6177.2,4185.92 6177.2,4185 6187,4185 6196,4176 6196,3945 6218,3923 6253,3923 6253.5,3922.5 6469.85,3922.5 6470.03,3922.68 6542.32,3922.68 6547,3918 6664,3918 v1(6665,3918) ; D20.10@6162.63,4207.75 ccw(c6180.17,4207.75) 6167.77,4195.35 ; v1@6660.52,3913.52 ccw(c6649.69,3902.69) 6649.69,3918 ccw(c6649.69,3933.31) v1@6660.52,3922.48
BANK2_NC34: D20.9 U22.Y4 | length 908.3
  Top Layer w15: v1(6778.28,3957.58) U22.Y4@6797.97,3937.89
  Bottom Layer w7: D20.9@6180.9,4206.33 cw(c6180.9,4187.55) 6194.17,4200.83 ; D20.9@6180.9,4213.33 cw(c6180.9,4211.45) D20.9@6182.22,4212.78 ; D20.9@6180.9,4218.57 6180.9,4214.1 6210,4185 6210,4042 6313.77,3938.23 6746.92,3938.23 6766.27,3957.58 v1(6778.28,3957.58) ; 6746.94,3938.25 cw(c6778.28,3906.91) v1@6778.28,3951.23 ; 6758.89,3950.2 cw(c6778.28,3930.81) v1@6778.28,3958.23
BANK2_NC35: D20.5 U22.AA2 | length 879.1
  Top Layer w7: v1@6689.54,4042.54 ccw(c6705.31,4058.31) 6705.31,4036 ; v1(6690,4043) 6691,4043 6698,4036 6739.23,4036 U22.AA2@6758.6,4016.63 ; v1@6694.48,4047.48 ccw(c6722.21,4075.21) 6722.21,4036 ; U22.AA2@6752.26,4016.63 ccw(c6736.94,4016.63) 6747.77,4027.46 ccw(c6758.6,4038.28) U22.AA2@6758.6,4022.97
  Bottom Layer w7: D20.5@6210.43,4307.16 6225.84,4307.16 6265.81,4267.19 6265.81,4141.19 6399,4008 6655,4008 v1(6690,4043) ; D20.5@6221.25,4305.74 cw(c6221.25,4291.22) 6231.51,4301.49 ; v1@6683.66,4043 cw(c6668.35,4043) 6679.17,4032.17 cw(c6690,4021.35) v1@6690,4036.66
BANK2_NC37: U22.T17
BANK2_NC38: U22.Y17 | length 27.8
  Top Layer w15: v1(6778.28,3406.39) U22.Y17@6797.97,3426.08
BANK2_NC39: U22.AB14
BANK2_NC40: U22.AA16 | length 27.8
  Top Layer w15: v1(6738.91,3445.76) U22.AA16@6758.6,3465.45
BANK2_NC41: U22.Y15
BANK2_NC42: U22.AB13 | length 27.8
  Top Layer w15: v1(6699.54,3563.87) U22.AB13@6719.23,3583.56
BATT12V: C88.1 C91.1 C104.1 C105.1 N3.2 P5.39 P5.40 R139.2 RT1.2 | length 3668.3
  Top Layer w30: C104.1@9392.38,4925.25 ccw(c9351.25,5026.99) 9461,5026.99 ; C104.1@9403.63,4897.43 ccw(c9369.24,4982.51) 9461,4982.51 ; v2(9405.2,4864) 9461,4919.8 ; C104.1@9414.87,4869.62 ccw(c9387.22,4938.02) 9461,4938.02 ; C104.1@9428.11,4918.94 ccw(c9444.11,4936.69) 9461,4919.79 ; C105.1@9567,5048 9482,5048 9461,5027 ; 9461,4919.8 9461,5027
  Top Layer w36: v3(9152,5044.56) v3(9152,5080.78)
  Top Layer w50: C91.1@8958,4677 9010,4677 9027.8,4694.8 ; C88.1@9010.67,4817.35 cw(c8969.34,4776.02) 9027.8,4776.02 cw(c9086.25,4776.02) C88.1@9044.92,4817.35 ; C88.1@9027.8,4864 9027.8,4694.8 ; 9027.79,4694.79 cw(c8979.76,4742.82) 8963,4677 ccw(c8979.76,4742.82) 9027.79,4694.79
  Top Layer w60: C88.1@9027.8,4864 v2(9405.2,4864) ; 9298.77,4864 ccw(c9298.77,5019.23) C104.1@9408.54,4909.46 ; 9299.77,4864 cw(c9299.77,4708.77) C104.1@9409.54,4818.54
  Mid-Layer 1 w39.37: P5.39@8417.26,4443.22 8496,4443.22 8503.22,4443.22 8704,4644 9301,4644 9407,4750 v2@9407,4815
  Bottom Layer w15: R139.2@8869,5123 9146,5123 v3(9152,5117) ; R139.2@8876.42,5115.58 cw(c8894.35,5097.65) 8894.35,5123 cw(c8894.35,5148.35) R139.2@8876.42,5130.42 ; 9119.41,5123 cw(c9119.41,5084.41) v3@9146.7,5111.7
  Bottom Layer w80: v2@9394.39,4902.39 ccw(c9453.28,4961.28) 9453.28,4878 ; v2@9395.39,4825.61 cw(c9521.88,4699.12) RT1.2@9521.88,4878 ; v2@9420,4878 RT1.2@9545,4878
  other v2: 9406,4815 9405,4913
BATTI: P1.3 R140.2 | length 1057.8
  Bottom Layer w15: R140.2@8860,5288 8944,5288 8995,5237 9480,5237 9516,5273 9516,5432 9552.24,5468.24 ; R140.2@8867.42,5280.58 cw(c8885.35,5262.65) 8885.35,5288 cw(c8885.35,5313.35) R140.2@8867.42,5295.42 ; P1.3@9578.81,5454.85 ccw(c9552.24,5435.18) 9552.24,5468.24 ; P1.3@9578.81,5481.62 cw(c9552.24,5501.29) 9552.24,5468.24 ; P1.3@9606.26,5468.24 9552.24,5468.24
BB#: U22.E6 U34.94 | length 1295
  Top Layer w15: U22.E6@7388.52,3859.15 v1(7408.21,3878.84)
  Mid-Layer 1 w7: v1(7287,4799) 7345.23,4799 7388.18,4756.05 7388.18,3910.02 7388,3909.84 7388,3899.04 v1(7408.21,3878.84) ; v1@7291.48,4794.52 cw(c7302.31,4783.69) 7302.31,4799 ; v1@7291.48,4794.52 cw(c7302.31,4783.69) 7302.31,4799 ; v1@7291.48,4794.52 cw(c7302.31,4783.69) 7302.31,4799 ; v1@7291.48,4803.48 ccw(c7302.31,4814.31) 7302.31,4799 ; v1@7291.48,4803.48 ccw(c7302.31,4814.31) 7302.31,4799 ; v1@7291.48,4803.48 ccw(c7302.31,4814.31) 7302.31,4799 ; 7397.38,3889.66 cw(c7386.55,3878.84) v1@7401.86,3878.84 ; 7397.38,3889.66 ccw(c7408.21,3900.49) v1@7408.21,3885.18 ; 7397.38,3889.66 cw(c7386.55,3878.84) v1@7401.86,3878.84 ; 7397.38,3889.66 ccw(c7408.21,3900.49) v1@7408.21,3885.18 ; 7397.38,3889.66 ccw(c7408.21,3900.49) v1@7408.21,3885.18 ; 7397.38,3889.66 cw(c7386.55,3878.84) v1@7401.86,3878.84
  Bottom Layer w10: U34.94@7224.06,4799.43 7286.57,4799.43 v1(7287,4799) ; 7274.26,4799.43 cw(c7274.26,4786.26) v1@7283.58,4795.58 ; 7274.26,4799.43 cw(c7274.26,4786.26) v1@7283.58,4795.58 ; 7274.26,4799.43 cw(c7274.26,4786.26) v1@7283.58,4795.58 ; 7276.35,4799.43 ccw(c7276.35,4809.65) v1@7283.58,4802.42 ; 7276.35,4799.43 ccw(c7276.35,4809.65) v1@7283.58,4802.42 ; 7276.35,4799.43 ccw(c7276.35,4809.65) v1@7283.58,4802.42
CK: C64.1 U22.J1 | length 209
  Top Layer w10: v1(7250.73,4075.69) 7250.73,4163.41 C64.1@7251.02,4163.7 ; v1@7247.3,4079.11 ccw(c7239.04,4087.38) 7250.73,4087.38 ; v1@7247.3,4079.11 ccw(c7239.04,4087.38) 7250.73,4087.38 ; v1@7247.3,4079.11 ccw(c7239.04,4087.38) 7250.73,4087.38 ; 7250.73,4087.38 ccw(c7262.42,4087.38) v1@7254.15,4079.11 ; 7250.73,4087.38 ccw(c7262.42,4087.38) v1@7254.15,4079.11 ; 7250.73,4087.38 ccw(c7262.42,4087.38) v1@7254.15,4079.11 ; C64.1@7247.48,4160.16 cw(c7239.65,4152.33) 7250.73,4152.33 ccw(c7239.65,4152.33) C64.1@7247.48,4160.16 ; 7250.73,4150.93 cw(c7263.79,4150.93) 7254.55,4160.16 ccw(c7263.79,4150.93) 7250.73,4150.93
  Top Layer w15: U22.J1@7231.04,4056 v1(7250.73,4075.69)
CKE#: U22.D1 U34.87 | length 1298.2
  Top Layer w15: U22.D1@7427.89,4056 v1(7447.58,4075.69)
  Mid-Layer 1 w7: v1(7310,4978) 7409.62,4978 7449,4938.62 7449,4077.11 v1(7447.58,4075.69) ; 7325.31,4978 cw(c7325.31,4993.31) 7314.48,4982.48 ccw(c7325.31,4993.31) 7325.31,4978 ; 7325.31,4978 ccw(c7325.31,4962.69) 7314.48,4973.52 cw(c7325.31,4962.69) 7325.31,4978 ; v1@7443.09,4080.17 ccw(c7428.83,4094.44) 7449,4094.44 ; v1@7443.09,4080.17 ccw(c7428.83,4094.44) 7449,4094.44 ; v1@7443.09,4080.17 ccw(c7428.83,4094.44) 7449,4094.44 ; 7449,4087.56 ccw(c7459.45,4087.56) v1@7452.06,4080.17 ; 7449,4087.56 ccw(c7459.45,4087.56) v1@7452.06,4080.17 ; 7449,4087.56 ccw(c7459.45,4087.56) v1@7452.06,4080.17
  Bottom Layer w10: U34.87@7224.06,4978.57 7225.49,4980 7308,4980 v1(7310,4978) ; U34.87@7252.95,4977.23 cw(c7259.64,4970.55) 7259.64,4980 ccw(c7259.64,4970.55) U34.87@7252.95,4977.23 ; 7293.48,4980 cw(c7293.48,4961.48) 7306.58,4974.58 ccw(c7293.48,4961.48) 7293.48,4980
CML: C137.2 U20.2 U23.34 | length 1205.5
  Top Layer w8: U20.2@6289,2426.21 6297.79,2426.21 v1(6298,2426) ; U23.34@7217.38,2615.14 ccw(c7226.12,2610.86) 7219.24,2603.98 ; 7223.36,2599.85 7215.11,2608.11 7215.11,2623.8 U23.34@7215.31,2624 7215.31,2607.9 7238.3,2584.91 7238.3,2517.3 C137.2@7229,2508 C137.2@7239.3,2518.3 ; C137.2@7226.87,2511.13 ccw(c7199.27,2538.73) 7238.3,2538.73 ; C137.2@7232.53,2505.47 ccw(c7218.58,2519.42) C137.2@7238.3,2519.42
  Mid-Layer 1 w20: v1(6298,2426) 6716,2426 6797,2507 v1(7231,2507)
CPLD_TCK: D20.16 J4.3 | length 2377
  Mid-Layer 1 w10: J4.3@5083.07,5551.3 ccw(c5069.57,5573.9) 5095.9,5573.9 ; J4.3@5095.9,5520.46 5095.9,5573.9 ; J4.3@5108.72,5551.3 cw(c5122.22,5573.9) 5095.9,5573.9 ; v1@5891.16,4302 ccw(c5879.47,4302) 5887.73,4310.27 ccw(c5896,4318.53) v1@5896,4306.84 ; v1(5896,4302) 5850,4348 5850,5555 5810.72,5594.28 5116.28,5594.28 5095.9,5573.9
  Bottom Layer w10: v1@5896,4297.16 cw(c5896,4285.47) 5904.27,4293.73 cw(c5912.53,4302) v1@5900.84,4302 ; v1(5896,4302) 5932,4266 5954,4266 6001.43,4218.57 D20.16@6043.1,4218.57
CPLD_TDI: D20.14 J4.5 | length 2188.7
  Mid-Layer 1 w10: J4.5@5295.9,5486.09 cw(c5295.9,5403.12) 5354.57,5461.79 ; J4.5@5295.9,5496.09 cw(c5295.9,5437.26) 5337.5,5478.86 ; J4.5@5295.9,5520.46 5367.36,5449 5688,5449 5734,5403 5734,4385 v1(5819,4300) ; J4.5@5320.9,5511.09 ccw(c5358.63,5511.09) 5331.95,5484.41 ; v1@5814.16,4300 ccw(c5802.47,4300) 5810.73,4308.27 ccw(c5819,4316.53) v1@5819,4304.84
  Bottom Layer w10: v1@5819,4295.16 cw(c5819,4283.47) 5827.27,4291.73 cw(c5835.53,4300) v1@5823.84,4300 ; v1(5819,4300) 5860,4259 5886,4259 6001,4144 6054,4144 6070,4160 6070,4178 6081.7,4189.7 6081.7,4217.8 D20.14@6082.47,4218.57
CPLD_TDO: D20.25 J4.4 | length 2525.1
  Mid-Layer 1 w10: J4.4@5187.66,5487.49 cw(c5183.62,5475.9) 5195.9,5475.9 ; J4.4@5195.9,5520.46 5195.9,5475.9 ; J4.4@5204.13,5487.49 ccw(c5208.17,5475.9) 5195.9,5475.9 ; v1@5960.58,4439.42 ccw(c5952.31,4447.69) 5964,4447.69 ccw(c5975.69,4447.69) v1@5967.42,4439.42 ; v1(5964,4436) 5964,5522 5864,5622 5093,5622 5052,5581 5052,5479 5082,5449 5169,5449 5195.9,5475.9
  Bottom Layer w10: v1@5964,4431.16 cw(c5964,4419.47) 5972.27,4427.73 cw(c5980.53,4436) v1@5968.84,4436 ; v1(5964,4436) 5984.57,4415.43 D20.25@6043.1,4415.43
CPLD_TMS: D20.15 J4.6 | length 2065.9
  Mid-Layer 1 w10: J4.6@5395.9,5520.46 5718.54,5520.46 5754,5485 5754,4413 v1(5865,4302) ; J4.6@5406.5,5509.86 cw(c5432.11,5484.25) 5432.11,5520.46 cw(c5432.11,5556.68) J4.6@5406.5,5531.07 ; J4.6@5413.58,5502.79 cw(c5456.25,5460.11) 5456.25,5520.46 cw(c5456.25,5580.82) J4.6@5413.58,5538.14 ; v1@5860.16,4302 ccw(c5848.47,4302) 5856.73,4310.27 ccw(c5865,4318.53) v1@5865,4306.84
  Bottom Layer w10: v1@5865,4297.16 cw(c5865,4281.79) 5875.87,4292.66 ; v1(5865,4302) 5866,4301 5867.52,4301 5918.52,4250 5943,4250 6003,4190 6053,4190 6062.79,4199.79 D20.15@6062.79,4218.57 ; 6057.29,4194.29 ccw(c6043.84,4207.75) D20.15@6062.87,4207.75
D0: U22.B22 U23.45 | length 762.2
  Top Layer w7: U23.45@7280.71,2807.5 7309.5,2807.5 7327,2790 v1(7327,2791) ; U23.45@7290.54,2805.52 cw(c7295.32,2800.74) 7295.32,2807.5 cw(c7295.32,2814.26) U23.45@7290.54,2809.48 ; 7314.47,2802.53 ccw(c7327,2815.07) v1@7327,2797.34 ; 7316.88,2800.12 cw(c7307.76,2791) v1@7320.66,2791 ; U22.B22@7506.63,3222.89 cw(c7506.63,3207.23) 7517.7,3218.3 ; U22.B22@7506.63,3227.37 U22.B22@7506.63,3229.23 7506.77,3229.23 v1(7525,3211) ; U22.B22@7512.97,3229.23 ccw(c7527.94,3229.23) 7517.36,3218.64 ; v1@7518.66,3211 ccw(c7503.35,3211) 7514.17,3221.83 ccw(c7525,3232.65) v1@7525,3217.34
  Mid-Layer 1 w7: v1(7327,2791) 7370,2834 7370,2878 7370,2896.05 ccw(c7360.55,2896.05) 7360.55,2905.5 7359.6,2905.5 cw(c7359.6,2914.95) 7350.15,2914.95 7350.15,2923.05 cw(c7359.6,2923.05) 7359.6,2932.5 7360.55,2932.5 ccw(c7360.55,2941.95) 7370,2941.95 7370,2946 7448.18,3024.18 cw(c7454.86,3017.5) 7461.54,3024.18 7462.22,3023.51 ccw(c7468.9,3030.19) 7475.58,3023.51 7481.31,3029.23 ccw(c7474.63,3035.92) 7481.31,3042.6 7480.64,3043.27 cw(c7487.32,3049.95) 7480.64,3056.64 7483.5,3059.5 7525,3101 v1(7525,3211) ; v1@7327,2797.34 ccw(c7327,2812.65) 7337.83,2801.83 ccw(c7348.65,2791) v1@7333.34,2791 ; v1@7520.52,3206.52 cw(c7509.69,3195.69) 7525,3195.69 cw(c7540.31,3195.69) v1@7529.48,3206.52
D1: U22.B21 U23.46 | length 762.2
  Top Layer w7: U23.46@7280.71,2827.2 v1@7332,2827.2 ; U23.46@7290.54,2825.22 cw(c7295.32,2820.44) 7295.32,2827.2 cw(c7295.32,2833.96) U23.46@7290.54,2829.18 ; 7314.76,2827.2 ccw(c7314.76,2845.24) v1@7327.52,2832.48 ; 7318.62,2827.2 cw(c7318.62,2814.62) v1@7327.52,2823.52 ; U22.B21@7506.63,3262.26 cw(c7506.63,3250.12) 7515.21,3258.7 ; U22.B21@7506.63,3268.6 7506.63,3267.28 v1@7525,3248.91 ; U22.B21@7512.97,3268.6 ccw(c7531.46,3268.6) 7518.39,3255.52 ; 7513.47,3260.45 ccw(c7526,3272.98) v1@7526,3255.25 ; 7515.88,3258.03 cw(c7506.76,3248.91) v1@7519.66,3248.91
  Mid-Layer 2 w7: v1(7332,2828) 7360.73,2856.73 7363.59,2859.59 ccw(c7356.91,2866.28) 7363.59,2872.96 7358.29,2878.26 cw(c7364.97,2884.94) 7358.29,2891.62 7364.02,2897.35 cw(c7370.7,2890.67) 7377.38,2897.35 7382.68,2892.05 ccw(c7389.37,2898.73) 7396.05,2892.05 7459.5,2955.5 7544.34,3040.34 7544.34,3231.66 v1@7527,3249 ; v1@7332,2834.34 ccw(c7332,2849.65) 7342.83,2838.83 ccw(c7353.65,2828) v1@7338.34,2828 ; v1@7526,3242.57 cw(c7526,3224.63) 7538.69,3237.32 ; v1@7532.34,3248.91 ccw(c7545.03,3248.91) 7536.06,3239.94
  other v1: 7526,3248.91
D2: U22.C20 U23.1 | length 789.6
  Top Layer w7: U23.1@7252.73,2902.43 ccw(c7247.95,2907.21) 7254.71,2907.21 ccw(c7261.47,2907.21) U23.1@7256.69,2902.43 ; U23.1@7254.71,2892.6 7254.71,2907.37 7267,2919.66 v20@7305,2919.66 ; U23.1@7257.51,2900.45 cw(c7280.96,2900.45) 7264.38,2917.04 ; 7286.01,2919.66 ccw(c7286.01,2938.99) v20@7299.68,2925.32 ; 7287.66,2919.66 cw(c7287.66,2902.66) v20@7299.68,2914.68 ; U22.C20@7467.26,3301.63 cw(c7467.26,3286.31) 7478.09,3297.14 cw(c7488.91,3307.97) U22.C20@7473.6,3307.97 ; U22.C20@7467.26,3307.97 v1(7486.95,3288.28) ; v1@7480.6,3288.28 ccw(c7465.29,3288.28) 7476.12,3299.11 ccw(c7486.95,3309.94) v1@7486.95,3294.62
  Mid-Layer 2 w7: v20(7305,2920) 7305,2924 7329.41,2948.41 7332.27,2951.27 ccw(c7325.59,2957.95) 7332.27,2964.63 7328.31,2968.59 cw(c7335,2975.27) 7328.31,2981.95 7334.04,2987.68 cw(c7340.72,2981) 7347.41,2987.68 7358.04,2977.04 7368.68,2966.41 ccw(c7375.36,2973.09) 7382.04,2966.41 7387.77,2972.13 ccw(c7381.09,2978.82) 7387.77,2985.5 7383.82,2989.45 cw(c7390.5,2996.14) 7383.82,3002.82 7410,3029 7505.66,3124.66 7505.66,3223.18 7506.29,3223.81 7506.29,3268.94 v1(7486.95,3288.28) ; v20@7305,2927.52 ccw(c7305,2936.03) 7311.02,2930.02 ; v20@7312.52,2920 cw(c7340.34,2920) 7320.67,2939.67 ; v1@7486.95,3281.94 cw(c7486.95,3266.63) 7497.77,3277.45 cw(c7508.6,3288.28) v1@7493.29,3288.28
D3: U22.D20 U23.2 | length 761.3
  Top Layer w7: U23.2@7233.89,2903.02 ccw(c7230.54,2910.69) 7238.91,2910.69 ; U23.2@7235.01,2892.6 7238.91,2896.5 7238.91,2910.69 ; 7274.36,2941.01 cw(c7288,2927.37) v1@7288,2946.66 ; 7278.34,2944.98 ccw(c7270.32,2953) v1@7281.66,2953 ; v1(7288,2953) 7291,2950 7291,2949 7282.35,2949 7266.01,2932.66 7260.88,2932.66 7238.91,2910.69 ; U22.D20@7427.89,3301.63 cw(c7427.89,3286.31) 7438.72,3297.14 cw(c7449.54,3307.97) U22.D20@7434.23,3307.97 ; U22.D20@7427.89,3307.97 7447,3288.86 v1(7447,3288.28) ; 7435.77,3300.09 cw(c7423.95,3288.28) v1@7440.66,3288.28 ; 7437.16,3298.7 ccw(c7447,3308.55) v1@7447,3294.62
  Mid-Layer 1 w7: v1(7288,2953) 7466.92,3131.92 7466.92,3138.05 ccw(c7457.47,3138.05) 7457.47,3147.5 7447,3147.5 cw(c7447,3156.95) 7437.55,3156.95 7437.55,3165.05 cw(c7447,3165.05) 7447,3174.5 7466.92,3174.5 7486.84,3174.5 ccw(c7486.84,3183.95) 7496.29,3183.95 7496.29,3192.05 ccw(c7486.84,3192.05) 7486.84,3201.5 7476.37,3201.5 cw(c7476.37,3210.95) 7466.92,3210.95 7466.92,3215 7466.92,3268.36 v1(7447,3288.28) ; v1@7288,2959.34 ccw(c7288,2974.65) 7298.83,2963.83 ccw(c7309.65,2953) v1@7294.34,2953 ; v1@7447,3281.94 cw(c7447,3266.63) 7457.83,3277.45 cw(c7468.65,3288.28) v1@7453.34,3288.28
D4: U22.D21 U23.3 | length 761.8
  Top Layer w7: U23.3@7214.07,2902.96 ccw(c7210.02,2911.21) 7219.21,2911.21 ; U23.3@7215.31,2892.6 7219.21,2896.5 7219.21,2911.21 ; 7245.76,2937.76 ccw(c7231.52,2952) v1@7251.66,2952 ; 7250.59,2942.59 cw(c7258,2935.17) v1@7258,2945.66 ; v1@7258,2950 7219.21,2911.21 ; U22.D21@7427.89,3262.26 cw(c7427.89,3246.73) 7438.87,3257.71 ; U22.D21@7427.89,3268.6 7427.98,3268.6 v1(7447.58,3249) ; U22.D21@7434.23,3268.6 ccw(c7449.33,3268.6) 7438.66,3257.92 ; v1@7441.23,3249 ccw(c7425.92,3249) 7436.75,3259.83 ccw(c7447.58,3270.65) v1@7447.58,3255.34
  Mid-Layer 2 w7: v1(7258,2952) 7350.63,3044.63 7353.49,3047.49 ccw(c7346.81,3054.17) 7353.49,3060.85 7349.85,3064.5 cw(c7356.53,3071.18) 7349.85,3077.86 7355.58,3083.59 cw(c7362.26,3076.91) 7368.94,3083.59 7379.26,3073.26 7389.59,3062.94 ccw(c7396.27,3069.62) 7402.95,3062.94 7408.68,3068.67 ccw(c7402,3075.35) 7408.68,3082.03 7398.36,3092.36 7388.03,3102.68 cw(c7394.71,3109.36) 7388.03,3116.04 7393.76,3121.77 cw(c7400.44,3115.09) 7407.12,3121.77 7417.45,3111.45 7427.77,3101.12 ccw(c7434.45,3107.81) 7441.14,3101.12 7446.86,3106.85 ccw(c7440.18,3113.53) 7446.86,3120.22 7441.5,3125.58 cw(c7446.46,3130.54) 7441.5,3135.5 7447.58,3141.58 v1(7447.58,3249) ; v1@7258,2958.34 ccw(c7258,2973.65) 7268.83,2962.83 ccw(c7279.65,2952) v1@7264.34,2952 ; v1@7443.09,3244.52 cw(c7432.26,3233.69) 7447.58,3233.69 cw(c7462.89,3233.69) v1@7452.06,3244.52
D5: U22.E20 U23.4 | length 775.9
  Top Layer w7: U23.4@7193.63,2902.43 ccw(c7184.66,2911.4) 7197.34,2911.4 ; U23.4@7195.61,2892.6 7197.34,2894.33 7197.34,2918.34 7222,2943 v1(7221,2944) ; 7208.76,2929.76 ccw(c7194.52,2944) v1@7214.66,2944 ; 7213.59,2934.59 cw(c7221,2927.17) v1@7221,2937.66 ; U22.E20@7388.52,3301.63 cw(c7388.52,3286.31) 7399.35,3297.14 cw(c7410.17,3307.97) U22.E20@7394.86,3307.97 ; U22.E20@7388.52,3307.97 v1(7408.49,3288) v1@7409,3288 ; v1@7402.15,3288 ccw(c7386.83,3288) 7397.66,3298.83 ccw(c7408.49,3309.65) v1@7408.49,3294.34
  Mid-Layer 1 w7: v1(7221,2944) 7345.5,3068.5 7353.54,3076.54 cw(c7360.23,3069.86) 7366.91,3076.54 7372.11,3071.34 ccw(c7378.79,3078.03) 7385.47,3071.34 7391.2,3077.07 ccw(c7384.52,3083.75) 7391.2,3090.44 7386,3095.64 cw(c7392.68,3102.32) 7386,3109 7388.86,3111.86 7388.86,3129.05 ccw(c7379.41,3129.05) 7379.41,3138.5 7373.7,3138.5 cw(c7373.7,3147.95) 7364.25,3147.95 7364.25,3156.05 cw(c7373.7,3156.05) 7373.7,3165.5 7388.86,3165.5 7407.65,3165.5 ccw(c7407.65,3174.95) 7417.1,3174.95 7417.1,3183.05 ccw(c7407.65,3183.05) 7407.65,3192.5 7398.31,3192.5 cw(c7398.31,3201.95) 7388.86,3201.95 7388.86,3206 7388.86,3261.06 7409,3281.2 v1@7409,3288.28 ; v1@7221,2950.34 ccw(c7221,2965.65) 7231.83,2954.83 ccw(c7242.65,2944) v1@7227.34,2944 ; 7392.52,3264.72 ccw(c7369.29,3287.95) v1@7402.15,3287.99 ; 7404.45,3276.65 ccw(c7393.12,3287.98) v1@7409.15,3288
D6: U22.F20 U23.5 | length 762.2
  Top Layer w7: U23.5@7173,2895.51 U23.5@7175.91,2892.6 7175.91,2941.91 7192,2958 v1(7193,2958) ; U23.5@7173.93,2902.43 ccw(c7169.15,2907.21) 7175.91,2907.21 ccw(c7182.67,2907.21) U23.5@7177.89,2902.43 ; 7180.47,2946.47 cw(c7193,2933.93) v1@7193,2951.66 ; 7182.88,2948.88 ccw(c7173.76,2958) v1@7186.66,2958 ; U22.F20@7349.15,3301.63 cw(c7349.15,3286.31) 7359.98,3297.14 cw(c7370.81,3307.97) U22.F20@7355.49,3307.97 ; U22.F20@7349.15,3307.97 v1(7368.84,3288.28) ; v1@7362.49,3288.28 ccw(c7347.18,3288.28) 7358.01,3299.11 ccw(c7368.84,3309.94) v1@7368.84,3294.62
  Mid-Layer 2 w7: v1(7193,2958) 7193,2959 7252.24,3018.24 7255.1,3021.1 ccw(c7248.42,3027.78) 7255.1,3034.46 7250.12,3039.44 cw(c7256.81,3046.12) 7250.12,3052.8 7255.85,3058.53 cw(c7262.53,3051.85) 7269.22,3058.53 7280.87,3046.87 7292.53,3035.22 ccw(c7299.21,3041.9) 7305.89,3035.22 7311.62,3040.94 ccw(c7304.94,3047.63) 7311.62,3054.31 7299.96,3065.96 7288.31,3077.62 cw(c7294.99,3084.3) 7288.31,3090.99 7294.04,3096.71 cw(c7300.72,3090.03) 7307.4,3096.71 7312.37,3091.74 ccw(c7319.06,3098.42) 7325.74,3091.74 7332.5,3098.5 7368.84,3134.84 v1(7368.84,3288.28) ; v1@7193,2964.34 ccw(c7193,2977.24) 7202.12,2968.12 ; v1@7199.34,2958 cw(c7217.07,2958) 7204.53,2970.53 ; v1@7364.35,3283.8 cw(c7353.52,3272.97) 7368.84,3272.97 cw(c7384.15,3272.97) v1@7373.32,3283.8
D7: U22.F19 U23.6 | length 762.2
  Top Layer w7: v1@7152.52,2952.52 cw(c7143.6,2943.6) 7156.21,2943.6 ; U23.6@7154.23,2902.43 ccw(c7149.45,2907.21) 7156.21,2907.21 ccw(c7162.97,2907.21) U23.6@7158.19,2902.43 ; U23.6@7156.21,2892.6 7156.21,2931 7156.21,2935.21 7156.21,2956.21 v1(7157,2957) ; 7156.21,2939.78 cw(c7174.22,2939.78) v1@7161.48,2952.52 ; U22.F19@7349.15,3341 cw(c7349.15,3325.68) 7359.98,3336.51 cw(c7370.81,3347.34) U22.F19@7355.49,3347.34 ; U22.F19@7349.15,3347.34 v1(7368.84,3327.65) ; v1@7362.49,3327.65 ccw(c7347.18,3327.65) 7358.01,3338.48 ccw(c7368.84,3349.31) v1@7368.84,3333.99
  Mid-Layer 1 w7: v1(7157,2957) 7157,2959 7241,3043 7243.86,3045.86 ccw(c7237.18,3052.55) 7243.86,3059.23 7238.73,3064.37 cw(c7245.41,3071.05) 7238.73,3077.73 7244.45,3083.46 cw(c7251.14,3076.78) 7257.82,3083.46 7269.64,3071.64 7281.46,3059.82 ccw(c7288.14,3066.5) 7294.82,3059.82 7300.55,3065.55 ccw(c7293.87,3072.23) 7300.55,3078.91 7295.41,3084.05 cw(c7302.09,3090.73) 7295.41,3097.41 7310.5,3112.5 7349.49,3151.49 7349.49,3308.31 v1(7368.84,3327.65) ; v1@7157,2963.34 ccw(c7157,2973.83) 7164.41,2966.41 ; v1@7163.34,2957 cw(c7183.48,2957) 7169.24,2971.24 ; v1@7362.49,3327.65 cw(c7347.18,3327.65) 7358.01,3316.82 cw(c7368.84,3306) v1@7368.84,3321.31
D8: U22.G20 U23.9 | length 762.2
  Top Layer w7: U23.9@7095.23,2902.43 ccw(c7090.45,2907.21) 7097.21,2907.21 ccw(c7103.97,2907.21) U23.9@7099.19,2902.43 ; U23.9@7097.21,2892.6 7097.21,2932.21 v1(7131,2966) ; v1@7124.66,2966 cw(c7109.35,2966) 7120.17,2955.17 cw(c7131,2944.35) v1@7131,2959.66 ; U22.G20@7309.78,3301.63 cw(c7309.78,3286.31) 7320.61,3297.14 cw(c7331.43,3307.97) U22.G20@7316.12,3307.97 ; U22.G20@7309.78,3307.97 v1(7329.47,3288.28) ; v1@7323.12,3288.28 ccw(c7307.81,3288.28) 7318.64,3299.11 ccw(c7329.47,3309.94) v1@7329.47,3294.62
  Mid-Layer 2 w7: v1(7131,2966) 7150.5,2985.5 7153.36,2988.36 ccw(c7146.68,2995.05) 7153.36,3001.73 7149.76,3005.34 cw(c7156.44,3012.02) 7149.76,3018.7 7155.48,3024.43 cw(c7162.17,3017.75) 7168.85,3024.43 7179.14,3014.14 7189.43,3003.85 ccw(c7196.11,3010.53) 7202.79,3003.85 7208.52,3009.58 ccw(c7201.84,3016.26) 7208.52,3022.94 7198.23,3033.23 7187.94,3043.52 cw(c7194.62,3050.2) 7187.94,3056.88 7193.67,3062.61 cw(c7200.35,3055.93) 7207.03,3062.61 7210.64,3059 ccw(c7217.32,3065.69) 7224,3059 7240.5,3075.5 7304.12,3139.12 7304.12,3231 7304.12,3262.94 v1(7329.47,3288.28) ; v1@7131,2972.34 ccw(c7131,2987.65) 7141.83,2976.83 ccw(c7152.65,2966) v1@7137.34,2966 ; v1@7323.12,3288.28 cw(c7307.81,3288.28) 7318.64,3277.45 cw(c7329.47,3266.63) v1@7329.47,3281.94
D9: U22.G19 U23.10 | length 762.2
  Top Layer w7: v1@7073.52,2939.52 cw(c7063.87,2929.87) 7077.51,2929.87 ; U23.10@7075.53,2902.43 ccw(c7070.75,2907.21) 7077.51,2907.21 ccw(c7084.27,2907.21) U23.10@7079.49,2902.43 ; U23.10@7077.51,2892.6 7077.51,2940.49 7077,2941 7077,2943 v1(7078,2944) ; 7077.51,2927.5 cw(c7094.5,2927.5) v1@7082.48,2939.52 ; U22.G19@7309.78,3341 cw(c7309.78,3325.68) 7320.61,3336.51 cw(c7331.43,3347.34) U22.G19@7316.12,3347.34 ; U22.G19@7309.78,3347.34 v1(7329.47,3327.65) ; v1@7323.12,3327.65 ccw(c7307.81,3327.65) 7318.64,3338.48 ccw(c7329.47,3349.31) v1@7329.47,3333.99
  Mid-Layer 1 w7: v1@7078,2950.34 ccw(c7078,2965.65) 7088.83,2954.83 ccw(c7099.65,2944) v1@7084.34,2944 ; v1@7081,2941 v1(7078,2944) 7132.5,2998.5 7135.36,3001.36 ccw(c7128.68,3008.05) 7135.36,3014.73 7133.93,3016.16 cw(c7140.61,3022.84) 7133.93,3029.53 7139.66,3035.25 cw(c7146.34,3028.57) 7153.02,3035.25 7161.14,3027.14 7169.25,3019.02 ccw(c7175.94,3025.7) 7182.62,3019.02 7188.35,3024.75 ccw(c7181.66,3031.43) 7188.35,3038.11 7186.91,3039.55 cw(c7193.59,3046.23) 7186.91,3052.91 7198,3064 7292,3158 7292,3269 7308.66,3285.66 7308.66,3306.84 v1(7329.47,3327.65) ; v1@7323.12,3327.65 cw(c7307.81,3327.65) 7318.64,3316.82 cw(c7329.47,3306) v1@7329.47,3321.31